# Altium PCB PCB_Rauch.PcbDoc
Units mm, origin at the board's own origin, x right, y up, seen from the top; angles counter-clockwise.
Board outline 100.02 x 50 mm, 2 copper layers (Top Layer, Bottom Layer); 19 components, 17 nets, 51 pads, 6 vias.
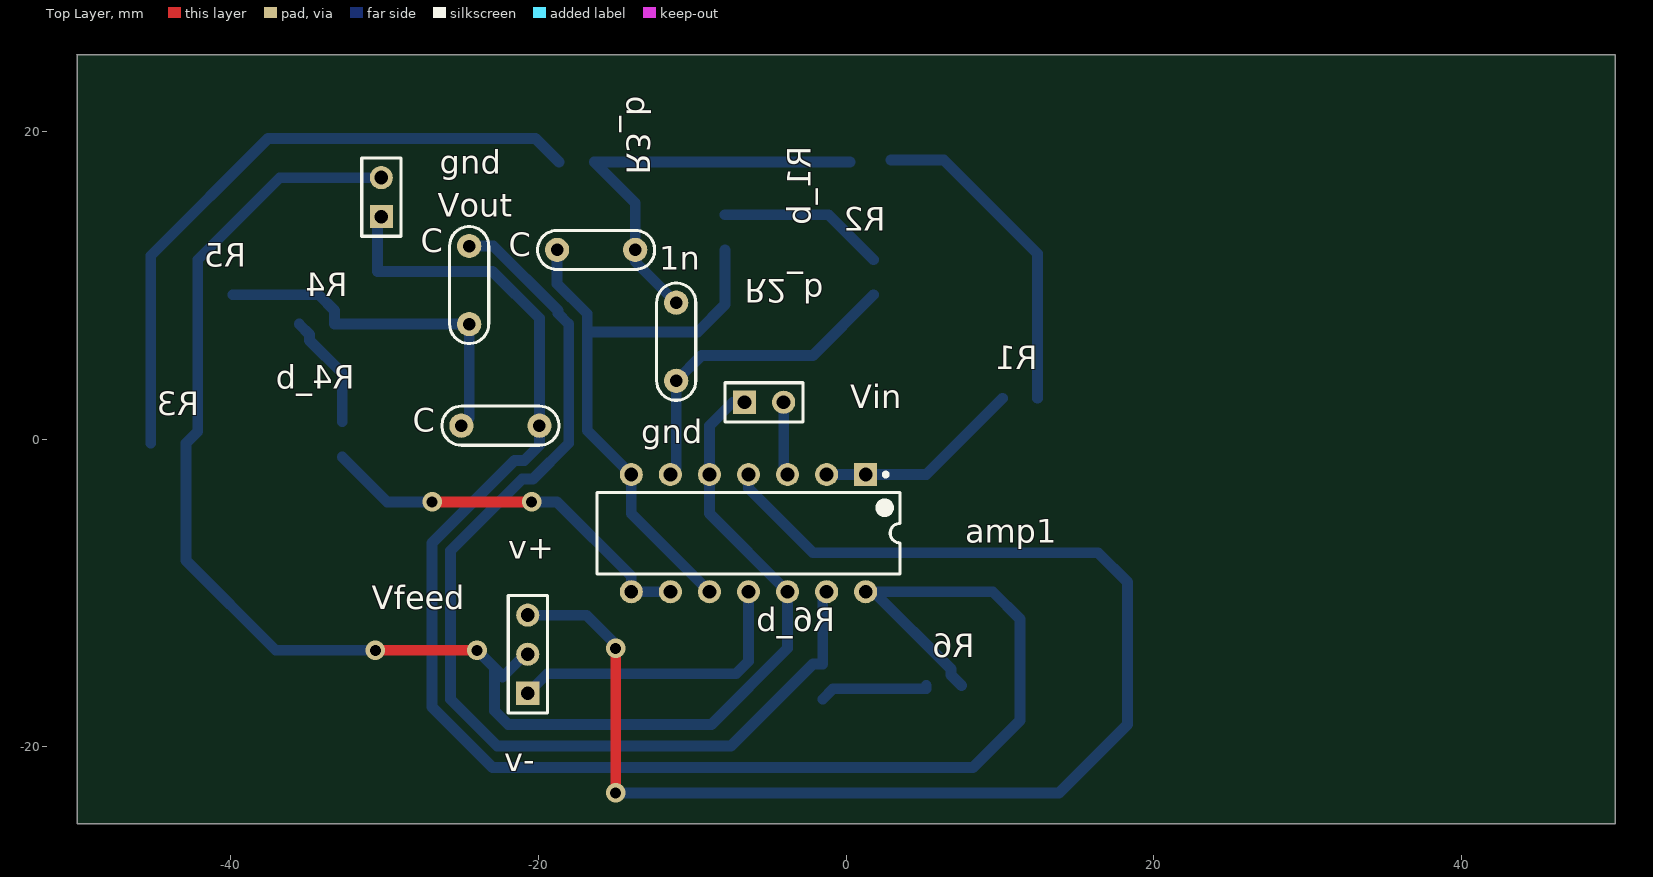
[diagram p0: Top Layer view]
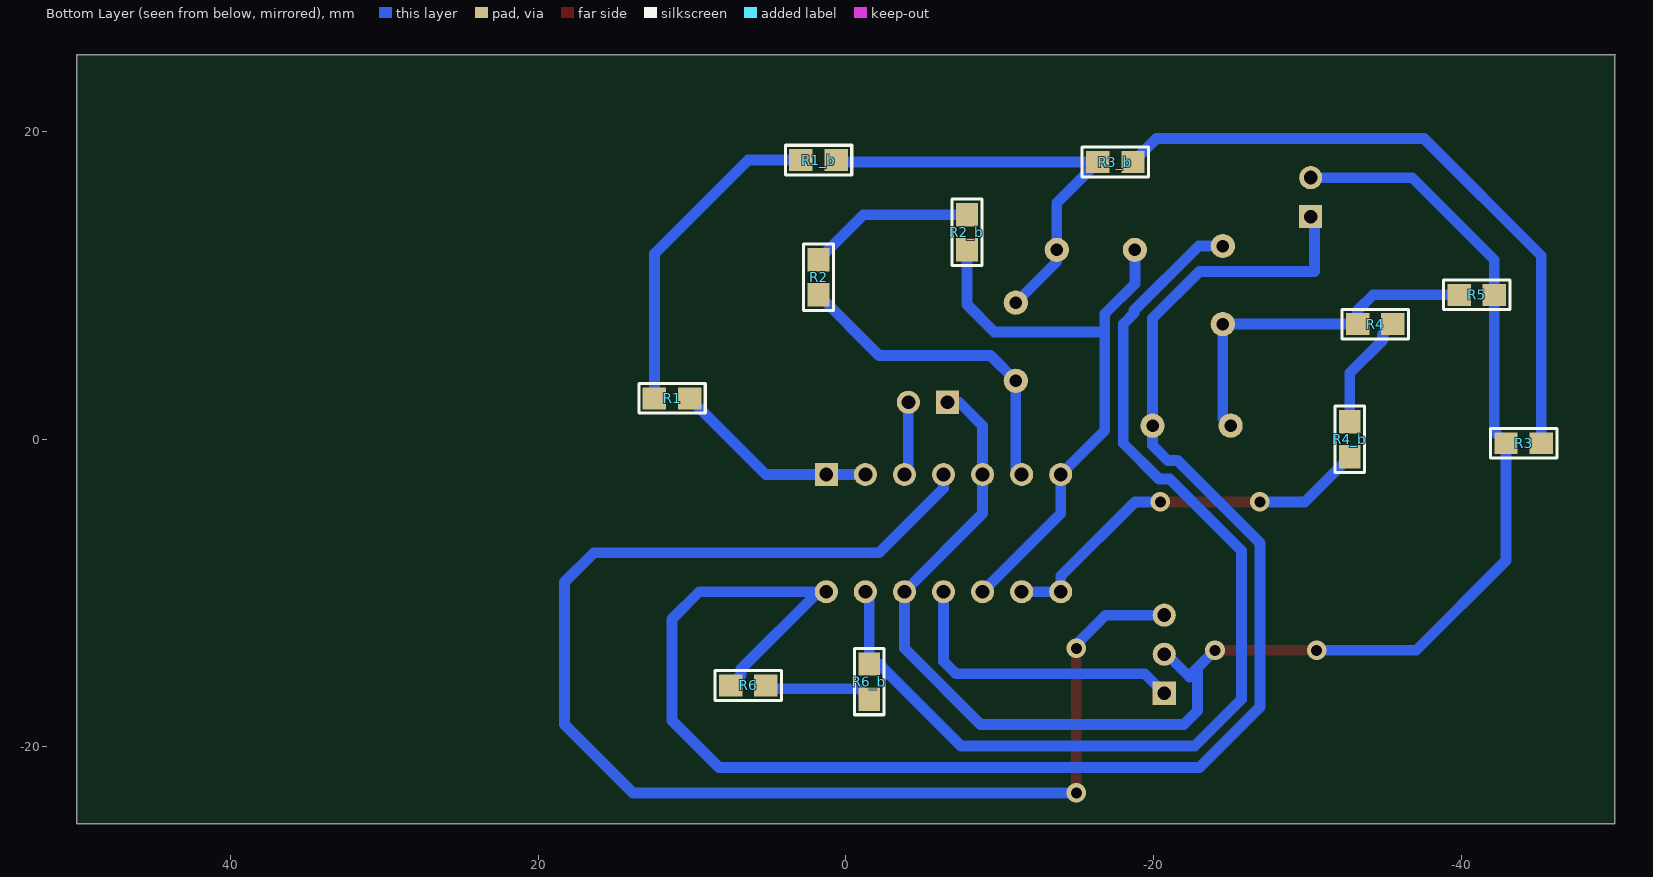
[diagram p1: Bottom Layer view, seen from below]
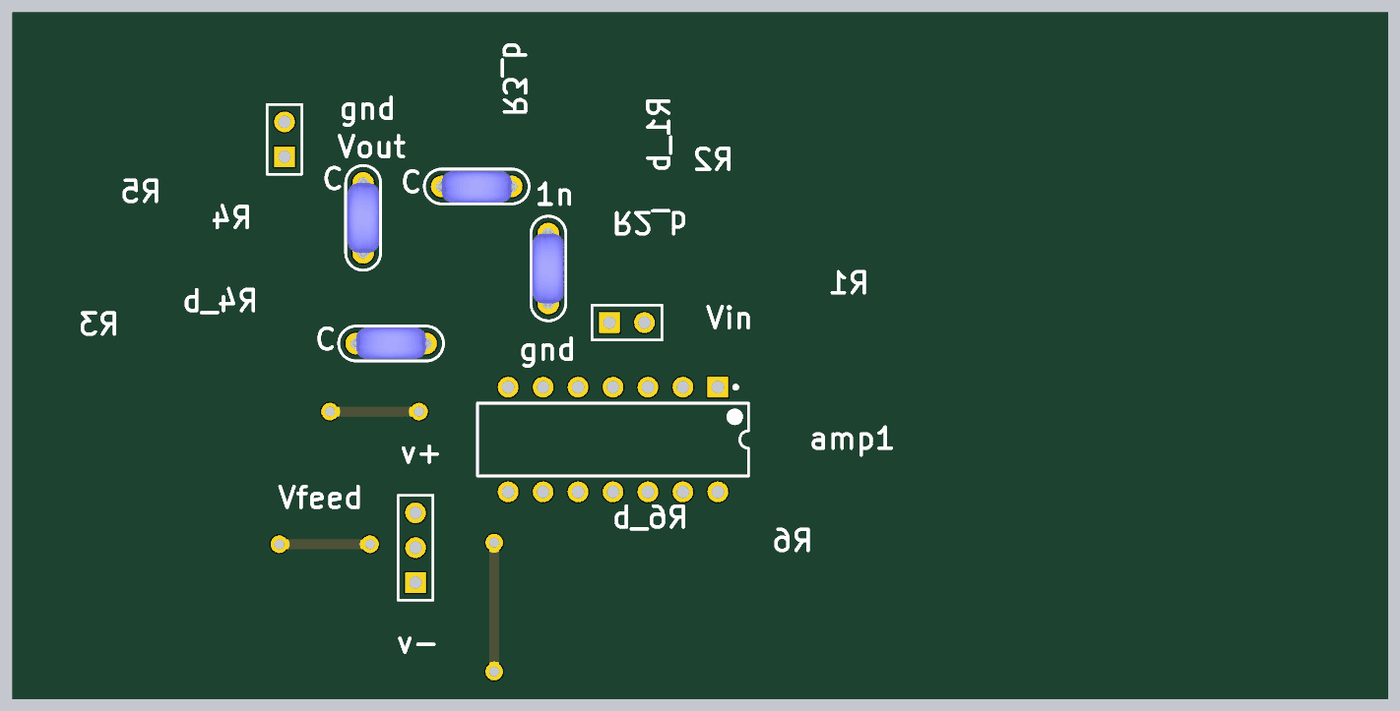
[diagram p2: 3D render of the assembled board from above, using the file's embedded part models]
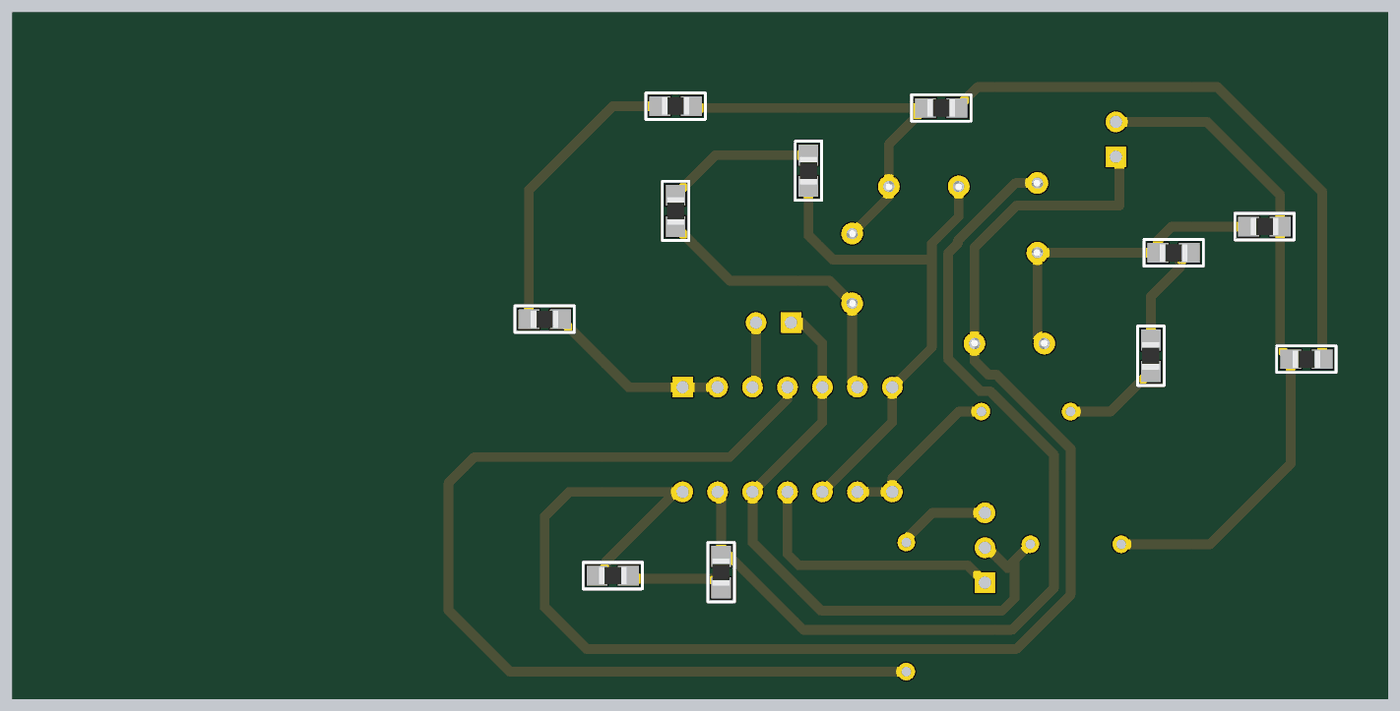
[diagram p3: 3D render of the assembled board from below, using the file's embedded part models]

## Layer stack, top to bottom
Top Solder: solder mask 0.0102, Solder Resist, Dk 3.5
Top Layer: signal copper 0.0356
Dielectric 1: dielectric 0.32, FR-4, Dk 4.8
Bottom Layer: signal copper 0.0356
Bottom Solder: solder mask 0.0102, Solder Resist, Dk 3.5

## Board outline
50,-25 -50,-25 -50,24.981 -50.019,25 50,25

## Design rules (kind name [scope] priority, off if disabled: settings)
Clearance [All] p1: gap=0.5 ignorepadtopadclearanceinfootprint=FALSE
PolygonConnect [All] p1: connectstyle=Relief reliefconductorwidth=0.254 reliefentries=4 polygonreliefangle="90 Angle" airgapwidth=0.254
RoutingVias [All] p1: holewidth=0.5 width=2 viastyle="Through Hole" minholewidth=0.3 minwidth=1.5 maxholewidth=0.5 maxwidth=2
SolderMaskExpansion [All] p1: expansion=0.102
Width [All] p1: maxlimit=0.9 minlimit=0.6 preferedwidth=0.9
30 further rules are at their usual default settings.

## Classes and differential pairs
component class Schematic_Rauch: 1n amp1 C R1 R1_b R2 R2_b R3 R3_b R4 R4_b R5 R6 R6_b Vfeed Vin Vout

## Components (designator, comment, footprint, x,y, rotation, side; value= is the part's Value field where it differs from the comment)
1n "C" CAP200 -11.049,6.35 r270 top
amp1 "TL084IN" TI-N14 -6.35,-6.096 r270 top
C "1n" CAP200 -16.256,12.319 r0 top
C "1n" CAP200 -22.479,0.889 r180 top
C "1n" CAP200 -24.511,10.033 r90 top
R1 "8k2" 0805 11.303,2.667 r0 bottom
R1_b "3k3" 0805 1.778,18.161 r180 bottom
R2 "1k2" 0805 1.778,10.541 r90 bottom
R2_b "33k" 0805 -7.874,13.462 r270 bottom
R3 "100" 0805 -44.069,-0.254 r180 bottom
R3_b "100" 0805 -17.526,18.034 r0 bottom
R4 "2k7" 0805 -34.417,7.493 r0 bottom
R4_b "6k8" 0805 -32.766,0 r90 bottom
R5 "270" 0805 -41.021,9.398 r0 bottom
R6 "5k6" 0805 6.35,-16.002 r0 bottom
R6_b "22k" 0805 -1.524,-15.748 r270 bottom
Vfeed "Vfeed" HDR1X3 -20.701,-16.51 r90 top
Vin "Header 2" HDR1X2 -6.604,2.413 r0 top
Vout "Header 2" HDR1X2 -30.226,14.478 r90 top

## Footprints (in the part's own frame and the unit in brackets; to place one, negate y for a bottom-side part, rotate by r counter-clockwise, add the part's x,y. Pads: shape width x height; smd on the part's side, far side on the other; paste and mask are expansions set on the pad)
0805 [mil] "Pasivo 0805"
  rect 60x56 smd: 1(-45,0) 2(45,0)
  silkscreen extent -85,-38 85,38, body extent -39,-25 39,25, height 15
CAP200 [mil]
  round 62 hole 32: 1(-100,0) 2(100,0)
  silkscreen extent -150,-50 150,50, body extent -110,-46 110,44, height 246
HDR1X2 [mm] "Connector; Header; 2 Position"
  rect 1.5x1.5 hole 0.9: 1(0,0)
  round 1.5 hole 0.9: 2(2.54,0)
  silkscreen extent -1.27,-1.27 3.81,1.27
HDR1X3 [mm] "Connector; Header; 3 Position"
  rect 1.5x1.5 hole 0.9: 1(0,0)
  round 1.5 hole 0.9: 2(2.54,0) 3(5.08,0)
  silkscreen extent -1.27,-1.27 6.35,1.27
TI-N14 [mm] "DIP, 14-Leads, Body 19.305x6.35 mm, Pitch 2.54 mm"
  rect 1.5x1.5 hole 0.9: 1(-3.81,7.62)
  round 1.5 hole 0.9: 2(-3.81,5.08) 3(-3.81,2.54) 4(-3.81,0) 5(-3.81,-2.54) 6(-3.81,-5.08) 7(-3.81,-7.62) 8(3.81,-7.62) 9(3.81,-5.08) 10(3.81,-2.54) 11(3.81,0) 12(3.81,2.54) 13(3.81,5.08) 14(3.81,7.62)
  silkscreen extent -3.93,-9.85 2.65,9.85, body extent -3.3,-9.85 3.3,9.85, height 5.08

## Part data
1n C C C: library part CAP
amp1: "JFET-Input Operational Amplifier, 7 to 36 V, -40 to 85 degC, 14-pin DIP (N14), Pb-Free (RoHS)", Manufacturer="Texas Instruments", Rating=Catalog, Supplier Part Number 1=296-7213-5-ND, Total Supply Voltage(Max)(+5V is 5, +/-5V is 10)=36, Total Supply Voltage(Min)(+5V is 5, +/-5V is 10)=7, CMRR(Min)(dB)=75, Code_JEDEC=MS-001, ComponentLink1Description="Manufacturer URL", ComponentLink1URL=http://www.ti.com/, ComponentLink2Description=Datasheet, ComponentLink2URL=http://www.ti.com/lit/ds/symlink/tl084.pdf, ComponentLink3Description="Package Specification", ComponentLink3URL=http://www.ti.com/lit/ml/mpdi002c/mpdi002c.pdf, DatasheetVersion=SLOS081G, Eco-Plan="Pb-Free (RoHS)", GBW(Typ)(MHz)=3, IIB(Max)(pA)=200, Iq per channel(Max)(mA)=2.8, Mounting Technology="Through Hole", Number of Channels=4, Offset Drift(Typ)(uV/C)=18, PackageDescription="14-Pin Plastic In-Line, Body 19.305 x 6.35 mm, Pitch 2.54 mm", PackageReference=N14, PackageVersion="4040049/E, 12/2002", PartNumber=TL084IN, Slew Rate(Typ)(V/us)=13, Sub Family="General Purpose Amplifier, High Supply Voltage Amplifier (>=30V)", Supplier 1=Digi-Key, Supplier 2=Farnell, Supplier 3=Newark, Supplier 4=Mouser, Supplier Part Number 2=1387834, Supplier Part Number 3=60K6994, Supplier Part Number 4=595-TL084IN, Vio (25C)(Max)(mV)=6, Vn at 1kHz(Typ)(nV/rtHz)=18
R1 R1_b R2 R2_b R3 R3_b R4 R4_b R5 R6 R6_b: library part RES
Vfeed: library part "Header 3", "Header, 3-Pin", LatestRevisionDate=17-Jul-2002, LatestRevisionNote="Re-released for DXP Platform.", Publisher="Altium Limited"
Vin Vout: "Header, 2-Pin", LatestRevisionDate=17-Jul-2002, LatestRevisionNote="Re-released for DXP Platform.", Publisher="Altium Limited"

## Via types
v1: diameter 1.27, hole 0.711, Top Layer to Bottom Layer, 6 vias

## Nets (pads, with @x,y where several pads share a name; then routed paths per layer and width w, separated by ;. In a path a pad name is that pad's centre, name@x,y a point inside that pad or via, vN(x,y) a via of type N, cw(c..) or ccw(c..) an arc to the next point about the centre after c; other vN are vias at no path point)
GND: amp1.5 amp1.12 R3.1 R5.1 Vfeed.2 Vin.1 Vout.2 | length 104.4
  Top Layer w0.7: v1(-30.607,-13.716) v1(-24.003,-13.716)
  Bottom Layer w0.7: v1(-30.607,-13.716) -37.084,-13.716 -42.926,-7.874 R3.1 -42.164,0.508 R5.1 -42.164,11.684 -36.83,17.018 Vout.2 ; v1(-24.003,-13.716) -22.348,-15.371 -22.348,-15.455 -22.86,-14.943 -22.86,-17.653 -21.971,-18.542 -8.763,-18.542 -3.81,-13.589 amp1.12 -8.89,-4.826 amp1.5 -8.89,0.889 -7.366,2.413 Vin.1 ; -22.301,-15.408 -20.863,-13.97 Vfeed.2
Net1n_1: 1n.1 C.2@-13.716,12.319 R1_b.2 R3_b.2 | length 28
  Bottom Layer w0.7: 1n.1 -13.716,11.557 -13.716,12.319 -13.716,15.367 R3_b.2 R1_b.2@0.254,18.034
Net1n_2: 1n.2 amp1.6 R2.1 | length 21.4
  Bottom Layer w0.7: amp1.6 -11.049,-1.905 1n.2 -9.398,5.461 -2.159,5.461 R2.1
Netamp1_1: amp1.1 amp1.2 R1.1 | length 13.5
  Bottom Layer w0.7: amp1.2 amp1.1 5.207,-2.286 R1.1
Netamp1_3: amp1.3 Vin.2 | length 5.2
  Bottom Layer w0.7: amp1.3 -4.064,-2.032 Vin.2 Vin.2@-3.81,2.159
Netamp1_7: amp1.7 amp1.10 C.1@-18.796,12.319 R2_b.2 | length 39.6
  Bottom Layer w0.7: C.1@-18.796,12.319 -18.796,10.125 -16.834,8.163 -16.834,6.985 ; amp1.10 -13.97,-4.826 amp1.7 -16.834,0.578 -16.834,6.985 ; R2_b.2 -7.874,8.763 -9.652,6.985 -16.834,6.985
Netamp1_8: amp1.8 amp1.9 R4_b.1 | length 25.6
  Top Layer w0.7: v1(-26.924,-4.064) v1(-20.447,-4.064)
  Bottom Layer w0.7: R4_b.1 -29.845,-4.064 v1(-26.924,-4.064) ; v1(-20.447,-4.064) -18.796,-4.064 -13.97,-8.89 amp1.8 amp1.9
Netamp1_13: amp1.13 C.2@-24.511,12.573 R6_b.1 | length 69.1
  Bottom Layer w0.7: C.2@-24.511,12.573 -22.941,12.573 -18.739,8.371 -18.739,8.198 -18.034,7.493 -18.034,-0.254 -20.359,-2.579 -21.062,-2.579 -25.724,-7.241 -25.724,-16.902 -22.687,-19.939 -7.493,-19.939 -2.159,-14.605 R6_b.1 -1.524,-10.16 amp1.13
Netamp1_14: amp1.14 C.1@-19.939,0.889 R6.2 Vout.1 | length 110.9
  Bottom Layer w0.7: Vout.1 -30.48,14.224 -30.48,10.922 -22.987,10.922 -19.939,7.874 -19.939,0.889 -19.939,-0.381 -20.937,-1.379 -21.559,-1.379 -26.924,-6.744 -26.924,-17.399 -22.987,-21.336 8.255,-21.336 11.303,-18.288 11.303,-11.684 9.525,-9.906 amp1.14@1.786,-9.906 ; amp1.14 amp1.14@1.786,-9.906 ; R6.2 6.819,-15.328 6.819,-14.939 amp1.14@1.786,-9.906
NetC_1: C.1@-24.511,7.493 C.2@-25.019,0.889 R4.2 R5.2 | length 23.5
  Bottom Layer w0.7: R5.2 -34.29,9.398 -33.274,8.382 R4.2 -24.511,7.493 -24.511,1.397 C.2@-25.019,0.889
NetR1_2: R1.2 R1_b.1 | length 21.4
  Bottom Layer w0.7: R1_b.1 6.35,18.161 12.446,12.065 R1.2
NetR2_2: R2.2 R2_b.1 | length 10.9
  Bottom Layer w0.7: R2_b.1 -1.143,14.605 R2.2
NetR3_2: R3.2 R3_b.1 | length 42.5
  Bottom Layer w0.7: R3.2 -45.212,11.938 -37.592,19.558 -20.193,19.558 R3_b.1
NetR4_1: R4.1 R4_b.2 | length 7.5
  Bottom Layer w0.7: R4.1 -34.886,6.819 -34.886,6.43 -32.766,4.31 R4_b.2
NetR6_1: R6.1 R6_b.2 | length 7.2
  Bottom Layer w0.7: R6_b.2 -0.85,-16.217 5.207,-16.217 R6.1
Vcc+: amp1.4 Vfeed.3 | length 88.6
  Top Layer w0.7: v1(-14.986,-22.987) v1(-14.986,-13.589)
  Bottom Layer w0.7: Vfeed.3 -16.891,-11.43 -14.986,-13.335 v1(-14.986,-13.589) ; v1(-14.986,-22.987) 13.843,-22.987 18.288,-18.542 18.288,-9.271 16.383,-7.366 -2.159,-7.366 -6.35,-3.175 amp1.4
Vcc-: amp1.11 Vfeed.1 | length 19.7
  Bottom Layer w0.7: Vfeed.1 -19.431,-15.24 -7.158,-15.24 -6.35,-14.432 amp1.11

## Silkscreen, mask and mechanical layers (free items; w line width, h text height)
Top Overlay:
  text "gnd" at -26.416,17.272 h1.52
  text "gnd" at -13.335,-0.254 h1.52
  text "v+" at -21.971,-7.747 h1.52
  text "v-" at -22.225,-21.59 h1.52